# EAGLE board BeVimExpansionBoard2 (EAGLE 7.7.0)
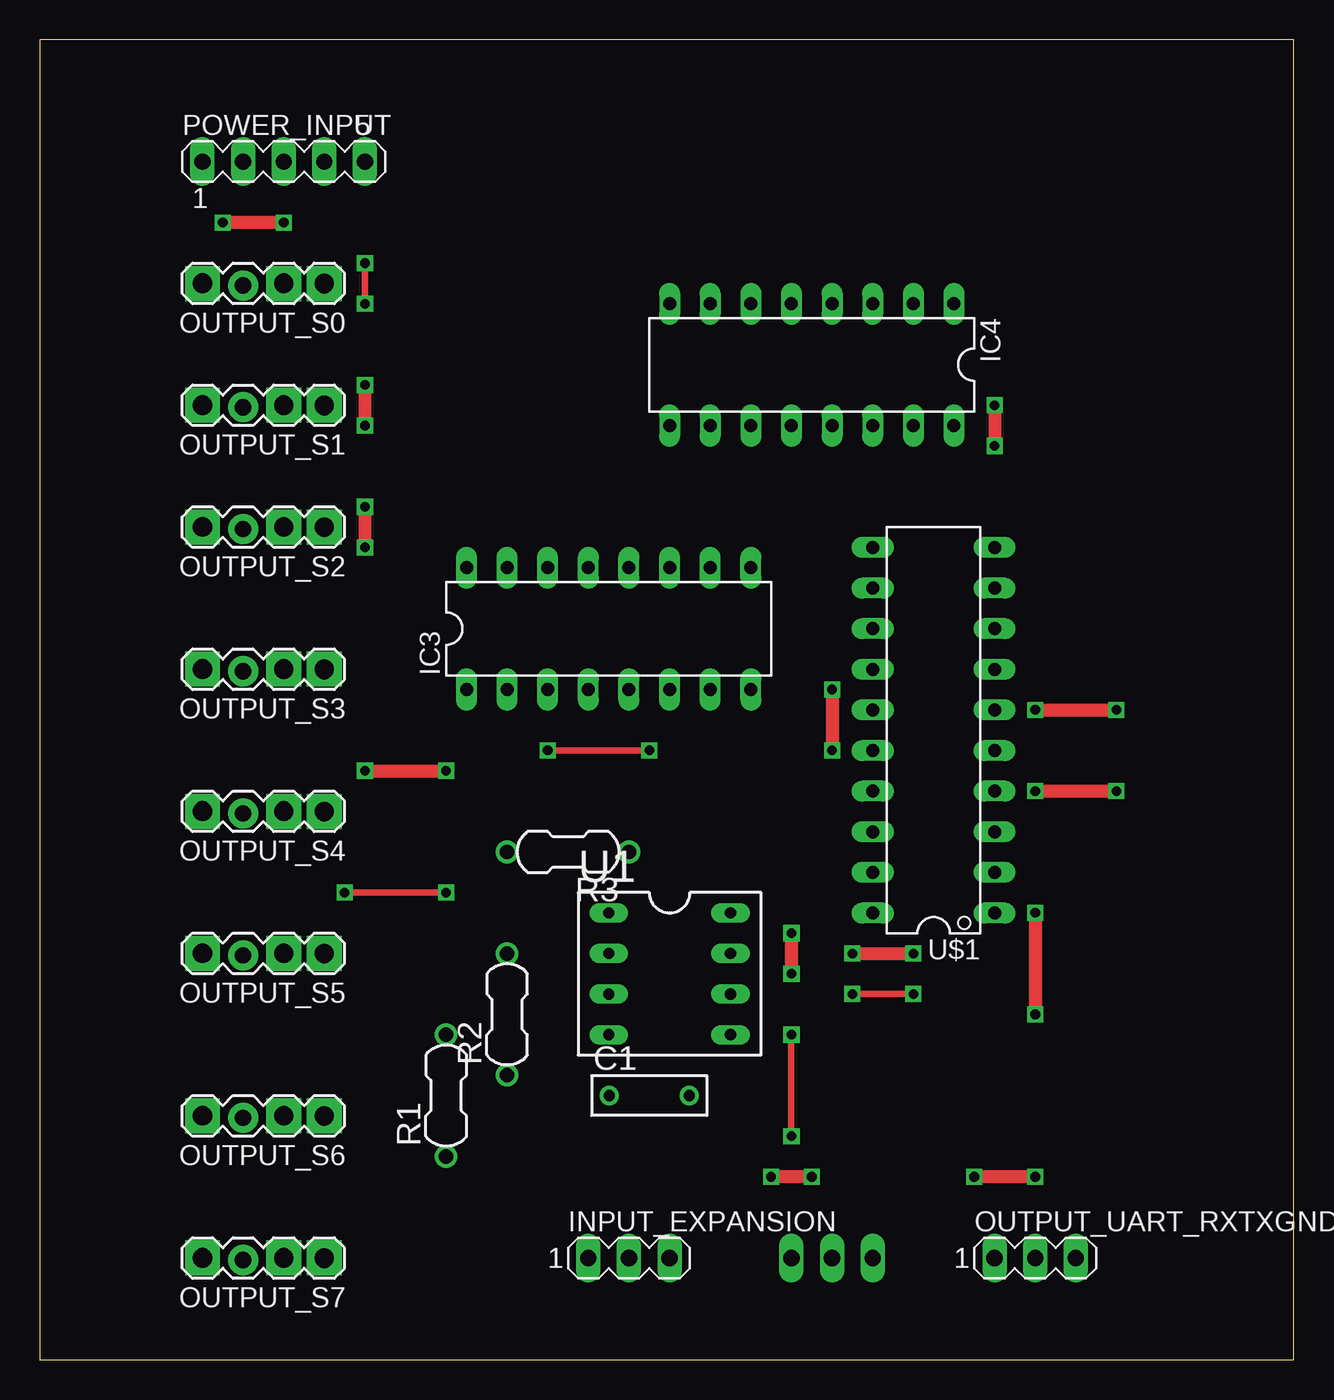
[diagram p0: board, top side]
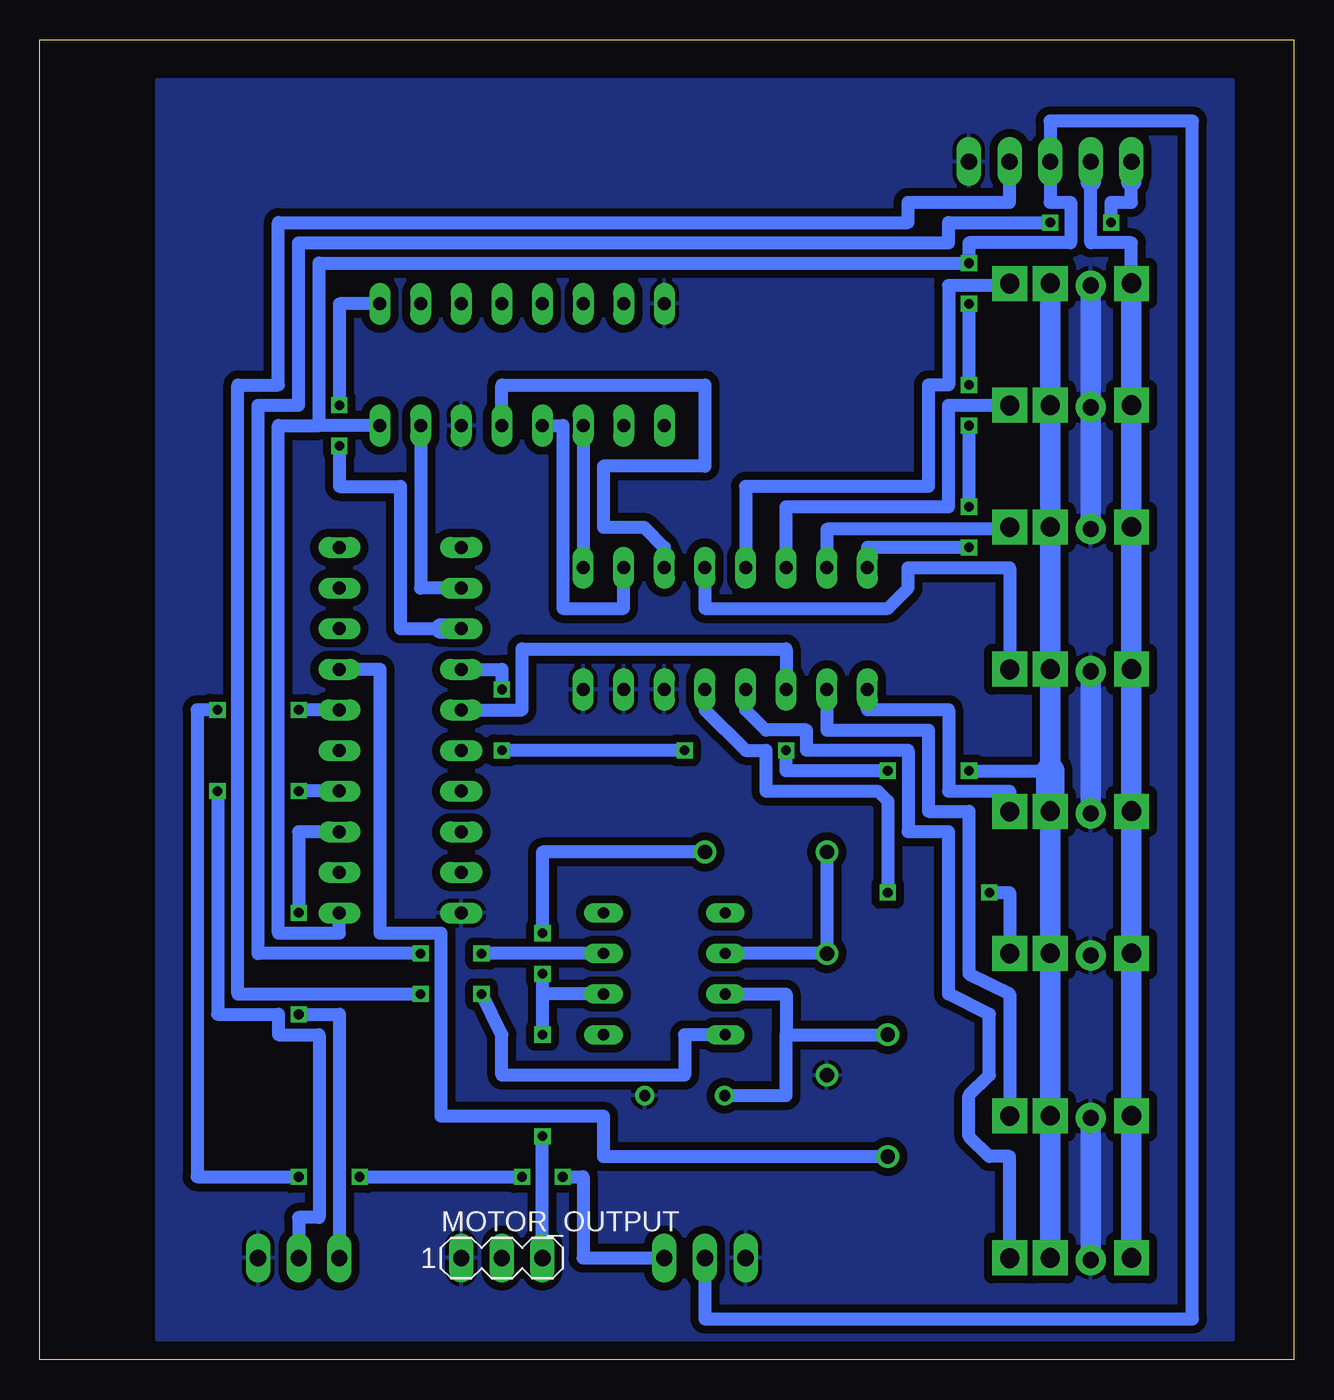
[diagram p1: board, bottom side, seen from below]

Size 78.41 x 82.54 mm. Coordinates in mm from the lower left corner, seen from the top.
Outline: 0,0 78.41,0 78.41,82.54 0,82.54 0,0
Copper layers (1*16): Top 0.035mm / dielectric 1.5mm / Bottom 0.035mm
Design rules "default *": minimum track width 10mil, minimum drill 24mil, track to track 20mil, track to pad 15mil, pad to pad 15mil, via to via 12mil, smd to smd 8mil, copper to edge 40mil, drill to drill 8mil, minimum pad ring 10mil, minimum via ring 8mil, stop-mask expansion 4mil, vias tented up to drill 0mil, thermal gap 10mil

## Footprints (pad centres in the part's own frame; a part is rotated, then mirrored left to right if it is on the bottom)
BOX-2.5MM-7.2MM = drill 0.7: P$1 -2.5,0; P$2 2.5,0
DIL16 = drill 0.813 long: 1 -8.89,-3.81; 2 -6.35,-3.81; 3 -3.81,-3.81; 4 -1.27,-3.81; 5 1.27,-3.81; 6 3.81,-3.81; 7 6.35,-3.81; 8 8.89,-3.81; 9 8.89,3.81; 10 6.35,3.81; 11 3.81,3.81; 12 1.27,3.81; 13 -1.27,3.81; 14 -3.81,3.81; 15 -6.35,3.81; 16 -8.89,3.81
MA03-1 = drill 1.016 long: 1 -2.54,0; 2 0,0; 3 2.54,0
1X04_LOCK = drill 1.016 pad 1.88 square: 1 0,0.127 | drill 1.016 pad 1.88: 2 2.54,-0.127; 3 5.08,0.127; 4 7.62,-0.127
MA05-1 = drill 1.016 long: 1 -5.08,0; 2 -2.54,0; 3 0,0; 4 2.54,0; 5 5.08,0
0.25W-0.3IN = drill 0.9: 1 -2.54,0; 2 5.08,0
DIP8 = drill 0.7 long: 1 0,2.54; 2 0,0; 3 0,-2.54; 4 0,-5.08; 5 7.62,-5.08; 6 7.62,-2.54; 7 7.62,0; 8 7.62,2.54
N20 = drill 0.813 long: 1 -11.435,-3.81; 2 -8.895,-3.81; 3 -6.355,-3.81; 4 -3.815,-3.81; 5 -1.275,-3.81; 6 1.265,-3.81; 7 3.805,-3.81; 8 6.345,-3.81; 9 8.885,-3.81; 10 11.425,-3.81; 11 11.425,3.81; 12 8.885,3.81; 13 6.345,3.81; 14 3.805,3.81; 15 1.265,3.81; 16 -1.275,3.81; 17 -3.815,3.81; 18 -6.355,3.81; 19 -8.895,3.81; 20 -11.435,3.81

## Placement (x,y rotation side)
C1  [BOX-2.5MM-7.2MM]  38.1,16.51 0 top
IC3  4051N  [DIL16]  35.56,45.72 0 top
IC4  4015N  [DIL16]  48.26,62.23 180 top
INPUT_EXPANSION  [MA03-1]  36.83,6.35 0 top
MOTOR_OUTPUT  [MA03-1]  49.53,6.35 0 bottom
OUTPUT_S0  [1X04_LOCK]  17.78,67.31 180 top
OUTPUT_S1  [1X04_LOCK]  17.78,59.69 180 top
OUTPUT_S2  [1X04_LOCK]  17.78,52.07 180 top
OUTPUT_S3  [1X04_LOCK]  17.78,43.18 180 top
OUTPUT_S4  [1X04_LOCK]  17.78,34.29 180 top
OUTPUT_S5  [1X04_LOCK]  17.78,25.4 180 top
OUTPUT_S6  [1X04_LOCK]  17.78,15.24 180 top
OUTPUT_S7  [1X04_LOCK]  17.78,6.35 180 top
OUTPUT_UART_RXTXGND  [MA03-1]  62.23,6.35 0 top
POWER_INPUT  [MA05-1]  15.24,74.93 0 top
R1  [0.25W-0.3IN]  25.4,15.24 90 top
R2  [0.25W-0.3IN]  29.21,20.32 90 top
R3  [0.25W-0.3IN]  34.29,31.75 180 top
U1  OPAMP  [DIP8]  35.56,25.4 0 top
U$1  G2X[0/3]2---N20  [N20]  55.88,39.37 90 top

## Library data of the parts
C1 = Capacitors; SPICE: C{NAME} {1.NET} {2.NET} {VALUE}
IC3 IC4 = 40xx
INPUT_EXPANSION MOTOR_OUTPUT OUTPUT_UART_RXTXGND POWER_INPUT = con-lstb; OC_FARNELL: unknown; OC_NEWARK: unknown
OUTPUT_S0 OUTPUT_S1-OUTPUT_S7 = SparkFun-Connectors
R1-R3 = Resistors; SPICE: R{NAME} {1.NET} {2.NET} {VALUE}
U1 = Op Amps; SPICE: X{NAME} {IN+.NET} {IN-.NET} {VCC.NET} {VEE.NET} {OUT.NET} OPAMP; SPICEMOD: .SUBCKT OPAMP 1 2 101 102 81\n.model NPN NPN(BF=50000)\nQ1 5 1 7 NPN\nQ2 6 2 8 NPN\nRC1 101 5 95.49\nRC2 101 6 95.49\nRE1 7 4 43.79\nRE2 8 4 43.79\nI1 4 102 0.001\nG1 100 10 6 5 0.0104719\nRP1 10 100 9.549MEG\nCP1 10 100 0.0016667UF\nEOUT 80 100 10 100 1\nRO 80 81 100\nRREF1 101 103 100K\nRREF2 103 102 100K\nEREF 100 0 103 0 1\nR100 100 0 1MEG\n.ENDS
U$1 = TI_MSP430_v16

## Nets
+3: IC3.16 IC4.16 INPUT_EXPANSION.2 POWER_INPUT.3 U$1.1
+5: OUTPUT_S0.4 OUTPUT_S1.4 OUTPUT_S2.4 OUTPUT_S3.4 OUTPUT_S4.4 OUTPUT_S5.4 OUTPUT_S6.4 OUTPUT_S7.4 POWER_INPUT.2
+12: POWER_INPUT.1 U1.7
-12: POWER_INPUT.4 U1.4
CLK: IC4.1 U$1.13
GND: C1.P$2 IC3.6 IC3.7 IC3.8 IC4.8 IC4.14 INPUT_EXPANSION.1 MOTOR_OUTPUT.1 OUTPUT_S0.3 OUTPUT_S1.3 OUTPUT_S2.3 OUTPUT_S3.3 OUTPUT_S4.3 OUTPUT_S5.3 OUTPUT_S6.3 OUTPUT_S7.3 OUTPUT_UART_RXTXGND.3 POWER_INPUT.5 R2.1 U$1.20
INPUT: IC4.15 U$1.12
INPUT_EXP: INPUT_EXPANSION.3 U$1.6
MOTOR: MOTOR_OUTPUT.3 R3.1 U1.6
N$1: IC3.11 IC4.13
N$2: IC3.10 IC4.12
N$3: C1.P$1 R1.2 U1.3
N$4: R2.2 R3.2 U1.2
N$5: R1.1 U$1.7
OVRF: IC3.9 IC4.11
RX: OUTPUT_UART_RXTXGND.1 U$1.3
SCL: OUTPUT_S0.2 OUTPUT_S1.2 OUTPUT_S2.2 OUTPUT_S3.2 OUTPUT_S4.2 OUTPUT_S5.2 OUTPUT_S6.2 OUTPUT_S7.2 U$1.14
SDA_MUX: IC3.3 U$1.15
SDA_S0: IC3.13 OUTPUT_S0.1
SDA_S1: IC3.14 OUTPUT_S1.1
SDA_S2: IC3.15 OUTPUT_S2.1
SDA_S3: IC3.12 OUTPUT_S3.1
SDA_S4: IC3.1 OUTPUT_S4.1
SDA_S5: IC3.5 OUTPUT_S5.1
SDA_S6: IC3.2 OUTPUT_S6.1
SDA_S7: IC3.4 OUTPUT_S7.1
TX: OUTPUT_UART_RXTXGND.2 U$1.4

## Tracks (layer width: path | path; a pad name or v marks a point on that pad's centre or on a via)
+3  (via drill 0.6)
  Top 0.406: v20.32,66.04 v20.32,68.58
  Top 0.813: v20.32,60.96 v20.32,58.42 | v20.32,53.34 v20.32,50.8
  Bottom 0.813: U$1.1 59.69,26.67 63.5,26.67 63.5,58.42 60.96,58.42 | IC4.16 60.96,58.42 | 60.96,58.42 60.96,68.58 v20.32,68.58 20.32,69.85 13.97,69.85 13.97,72.39 15.24,72.39 POWER_INPUT.3 15.24,77.47 6.35,77.47 6.35,2.54 36.83,2.54 INPUT_EXPANSION.2 | v20.32,66.04 v20.32,60.96 | v20.32,58.42 v20.32,53.34 | v20.32,50.8 26.67,50.8 IC3.16
+5  (via drill 1.2 pad 2.18)
  Bottom 0.813: OUTPUT_S0.4 10.16,69.85 12.7,69.85 12.7,73.66
  Bottom 1.27: OUTPUT_S7.4 v10.16,15.24 OUTPUT_S6.4 v10.16,25.4 OUTPUT_S5.4 v10.16,34.29 OUTPUT_S4.4 v10.16,43.18 OUTPUT_S3.4 v10.16,52.07 OUTPUT_S2.4 v10.16,59.69 OUTPUT_S1.4 v10.16,67.31 OUTPUT_S0.4 | POWER_INPUT.2 12.7,73.66
+12  (via drill 0.6)
  Top 0.813: v50.8,25.4 v54.61,25.4 | v15.24,71.12 v11.43,71.12
  Bottom 0.813: U1.7 v50.8,25.4 | v54.61,25.4 64.77,25.4 64.77,59.69 62.23,59.69 62.23,69.85 21.59,69.85 21.59,71.12 v15.24,71.12 | v11.43,71.12 11.43,72.39 10.16,72.39 10.16,73.66
  Bottom 1.27: POWER_INPUT.1 10.16,73.66
-12  (via drill 0.6)
  Top 0.406: v50.8,22.86 v54.61,22.86
  Bottom 0.813: v54.61,22.86 66.04,22.86 66.04,60.96 63.5,60.96 63.5,71.12 24.13,71.12 24.13,72.39 17.78,72.39 POWER_INPUT.4 | U1.4 38.1,20.32 38.1,17.78 49.53,17.78 49.53,20.32 v50.8,22.86
CLK  (via drill 0.6)
  Top 0.813: v59.69,59.69 v59.69,57.15
  Bottom 0.813: IC4.1 59.69,66.04 v59.69,59.69 | v59.69,57.15 59.69,54.61 55.88,54.61 55.88,45.72 53.34,45.72
  Bottom 1.27: U$1.13 53.34,45.72
GND
  Bottom 0.406: C1.P$2 40.64,16.51
  Bottom 1.27: OUTPUT_S0.3 OUTPUT_S1.3 OUTPUT_S2.3 | OUTPUT_S3.3 OUTPUT_S4.3 | OUTPUT_S7.3 OUTPUT_S6.3
  pour Bottom: 3.81,80.01 71.12,80.01 71.12,1.27 3.81,1.27
INPUT
  Bottom 0.406: 54.61,48.26 53.34,48.26
  Bottom 0.813: U$1.12 54.61,48.26 IC4.15
INPUT_EXP  (via drill 0.6)
  Top 0.813: v62.23,40.64 v67.31,40.64 | v62.23,11.43 v58.42,11.43 | v48.26,11.43 v45.72,11.43
  Bottom 0.813: U$1.6 v62.23,40.63 v62.23,40.64 | v67.31,40.64 68.58,40.64 68.58,11.43 v62.23,11.43 | v58.42,11.43 v48.26,11.43 | v45.72,11.43 44.45,11.43 44.45,6.35 INPUT_EXPANSION.3
MOTOR  (via drill 0.6)
  Top 0.406: v46.99,20.32 v46.99,13.97
  Top 0.813: v46.99,26.67 v46.99,24.13
  Bottom 0.813: MOTOR_OUTPUT.3 v46.99,13.97 | R3.1 46.99,31.75 v46.99,26.67 | v46.99,24.13 46.99,22.86 | 46.99,22.86 v46.99,20.32 | U1.6 46.99,22.86
N$1
  Bottom 0.813: IC4.13 49.53,60.96 36.83,60.96 36.83,55.88 43.18,55.88 43.18,52.07 40.64,52.07 39.37,50.8 IC3.11
N$2
  Bottom 0.813: IC4.12 45.72,58.42 45.72,46.99 41.91,46.99 IC3.10
N$3
  Bottom 0.813: C1.P$1 31.75,16.51 31.75,20.32 | U1.3 31.75,22.86 31.75,20.32 | 31.75,20.32 R1.2
N$4
  Bottom 0.813: R3.2 R2.2 U1.2
N$5
  Bottom 0.406: U$1.7 58.42,43.17 58.42,43.18
  Bottom 0.813: 58.42,43.18 57.15,43.18 57.15,26.67 53.34,26.67 53.34,15.24 43.18,15.24 43.18,12.7 R1.1
N$49  (via drill 1.2 pad 2.18)
  other vias: 10.16,6.35
N$50  (via drill 1.2 pad 2.18)
  other vias: 17.78,52.07
OVRF
  Bottom 0.813: IC4.11 IC3.9
RX  (via drill 0.6)
  Top 0.813: v62.23,27.94 v62.23,21.59
  Bottom 0.813: U$1.3 62.23,33.02 | 62.23,33.02 | 62.23,33.02 v62.23,27.94 | v62.23,21.59 59.69,21.59 OUTPUT_UART_RXTXGND.1
SCL  (via drill 0.6, 1.2 pad 2.18)
  Top 0.406: v38.1,38.1 v31.75,38.1
  Top 0.813: v20.32,36.83 v25.4,36.83 | v49.53,41.91 v49.53,38.1
  Bottom 0.406: OUTPUT_S4.2 v15.24,34.29 | OUTPUT_S7.2 v15.24,6.35
  Bottom 0.813: v38.1,38.1 v49.53,38.1 | v20.32,36.83 15.24,36.83 | U$1.14 49.53,43.17 v49.53,41.91 | v25.4,36.83 31.75,36.83 v31.75,38.1
  Bottom 1.27: OUTPUT_S7.2 v15.24,15.24 OUTPUT_S6.2 v15.24,25.4 OUTPUT_S5.2 v15.24,34.29 | 15.24,36.83 v15.24,43.18 OUTPUT_S3.2 v15.24,52.07 OUTPUT_S2.2 v15.24,59.69 OUTPUT_S1.2 v15.24,67.31 OUTPUT_S0.2
  Bottom 1.778: OUTPUT_S4.2 15.24,36.83
SDA_MUX
  Bottom 0.406: U$1.15
  Bottom 0.813: U$1.15 48.26,40.64 48.26,44.45 31.75,44.45 IC3.3
SDA_S0  (via drill 1.2 pad 2.18)
  Bottom 0.813: v17.78,67.31 OUTPUT_S0.1 21.59,67.18 21.59,60.96 22.86,60.96 22.86,54.61 34.29,54.61 IC3.13
SDA_S1  (via drill 1.2 pad 2.18)
  Bottom 0.813: v17.78,59.69 21.59,59.69 21.59,53.34 31.75,53.34 IC3.14
  Bottom 1.27: v17.78,59.69 OUTPUT_S1.1
SDA_S2
  Bottom 0.813: OUTPUT_S2.1 29.21,51.94 IC3.15
SDA_S3  (via drill 1.2 pad 2.18)
  Bottom 0.813: IC3.12 36.83,46.99 25.4,46.99 24.13,48.26 24.13,49.53 17.78,49.53 v17.78,43.18
  Bottom 1.27: v17.78,43.18 OUTPUT_S3.1
SDA_S4  (via drill 1.2 pad 2.18)
  Bottom 0.813: v17.78,34.29 17.78,35.56 21.59,35.56 21.59,40.64 26.67,40.64 IC3.1
  Bottom 1.27: v17.78,34.29 OUTPUT_S4.1
SDA_S5  (via drill 0.6, 1.2 pad 2.18)
  Top 0.406: v19.05,29.21 v25.4,29.21
  Bottom 0.813: v25.4,29.21 25.4,34.92 26.03,35.56 33.02,35.56 33.02,38.1 34.29,38.1 36.83,40.64 IC3.5 | v19.05,29.21 17.78,29.21 v17.78,25.4 OUTPUT_S5.1
SDA_S6  (via drill 1.2 pad 2.18)
  Bottom 0.813: IC3.2 29.21,39.37 22.86,39.37 22.86,34.29 20.32,34.29 20.32,24.13 17.78,22.86 v17.78,15.24 OUTPUT_S6.1
SDA_S7  (via drill 1.2 pad 2.18)
  Bottom 0.813: v17.78,6.35 17.78,12.7 19.05,12.7 20.32,13.97 20.32,16.51 19.05,17.78 19.05,21.59 21.59,22.86 21.59,33.02 24.13,33.02 24.13,38.1 30.48,38.1 30.48,39.37 33.02,39.37 34.29,40.64 IC3.4
  Bottom 1.27: OUTPUT_S7.1 v17.78,6.35
TX  (via drill 0.6)
  Top 0.813: v62.23,35.56 v67.31,35.56
  Bottom 0.813: U$1.4 v62.23,35.55 v62.23,35.56 | v67.31,35.56 67.31,21.59 63.5,21.59 63.5,20.32 60.96,20.32 60.96,8.89 62.23,8.89 OUTPUT_UART_RXTXGND.2